# EAGLE board EJ5 Clase 2 - Robótica (EAGLE 9.7.0)

Size 160.09 x 68.12 mm. Coordinates in mm from the lower left corner, seen from the top.
Outline: 0,0 160.09,0 160.09,68.12 0,68.12 0,0
Copper layers (1*16): Top 0.035mm / dielectric 1.5mm / Bottom 0.035mm
Design rules "default": minimum track width 6mil, minimum drill 0.35mm, track to track 6mil, track to pad 6mil, pad to pad 6mil, via to via 6mil, smd to smd 6mil, copper to edge 40mil, drill to drill 6mil, minimum pad ring 10mil, minimum via ring 8mil, stop-mask expansion 4mil, vias tented up to drill 0mil, thermal gap 10mil

## Footprints (pad centres in the part's own frame; a part is rotated, then mirrored left to right if it is on the bottom)
LEDRD254W60D565H860B = drill 0.981 pad 1.581: 1 -1.27,0; 2 1.27,0
BATTERY-GENERIC = drill 1.118 pad 3.15 octagon: + 2.54,0; - -2.54,0
RESAD1016W63L850D250B = drill 0.83 pad 1.43: 1 -5.08,0; 2 5.08,0
SWITCH-SPDT-PTH-8.5X3.7MM = drill 1.016 pad 1.88: 1 -2.54,0; 2 0,0; 3 2.54,0
TO92 = drill 0.813 octagon: 1 -1.27,0; 2 0,1.905; 3 1.27,0

## Placement (x,y rotation side)
D1  RED  [LEDRD254W60D565H860B]  105.86,32.94 270 top
P1  BATTERYGENERIC  [BATTERY-GENERIC]  8.26,35.15 180 top
P2  BATTERYGENERIC  [BATTERY-GENERIC]  151.84,59.86 180 top
R1  3k  [RESAD1016W63L850D250B]  105.86,46.88 90 top
R2  1k  [RESAD1016W63L850D250B]  59.48,6.99 0 top
S1  TOGGLE  [SWITCH-SPDT-PTH-8.5X3.7MM]  30.9,6.99 0 top
T1  NPN  [TO92]  91.51,11.82 0 top

## Library data of the parts
D1 = Tinkercad; CATEGORY: Opto-Electronic; SUB-CATEGORY: LED; VALUE: LED_RED
P1 P2 R1 R2 S1 = Tinkercad
T1 = Tinkercad; CATEGORY: Transistor; SUB-CATEGORY: BJT; TYPE: NPN

## Nets
D1_A: D1.1 R1.1
D1_C: D1.2 T1.1
P1+: P1.+ S1.2
P1-: P1.- P2.- T1.3
P2+: P2.+ R1.2
S1_S: R2.1 S1.3
T1_B: R2.2 T1.2

## Tracks (layer width: path | path; a pad name or v marks a point on that pad's centre or on a via)
D1_A  (1 unrouted)
D1_C  (1 unrouted)
P1+  (1 unrouted)
P1-  (2 unrouted)
P2+  (1 unrouted)
S1_S  (1 unrouted)
T1_B  (1 unrouted)